# Altium PCB RF-2530-a.PcbDoc
Units mm, origin at the board's own origin, x right, y up, seen from the top; angles counter-clockwise.
Board outline 26.25 x 38.25 mm, 2 copper layers (Top Layer, Bottom Layer); 37 components, 37 nets, 138 pads, 97 vias.
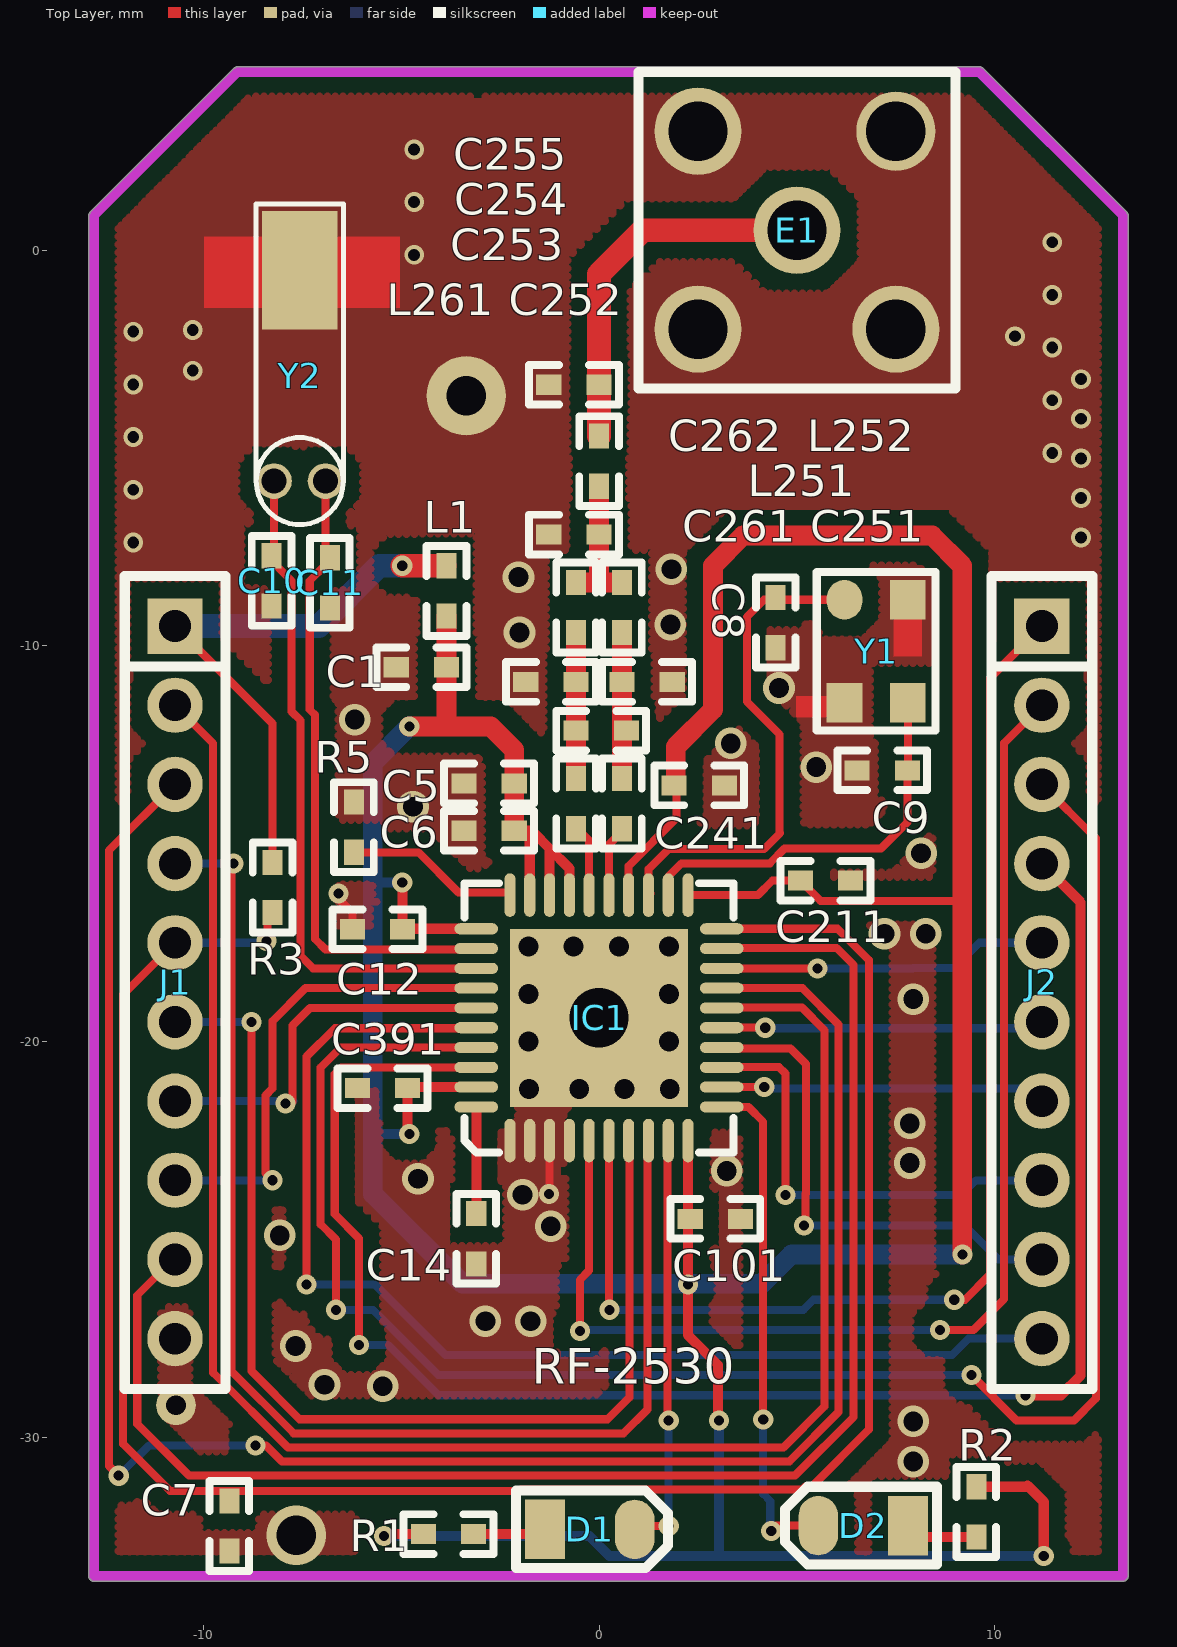
[diagram p0: Top Layer view]
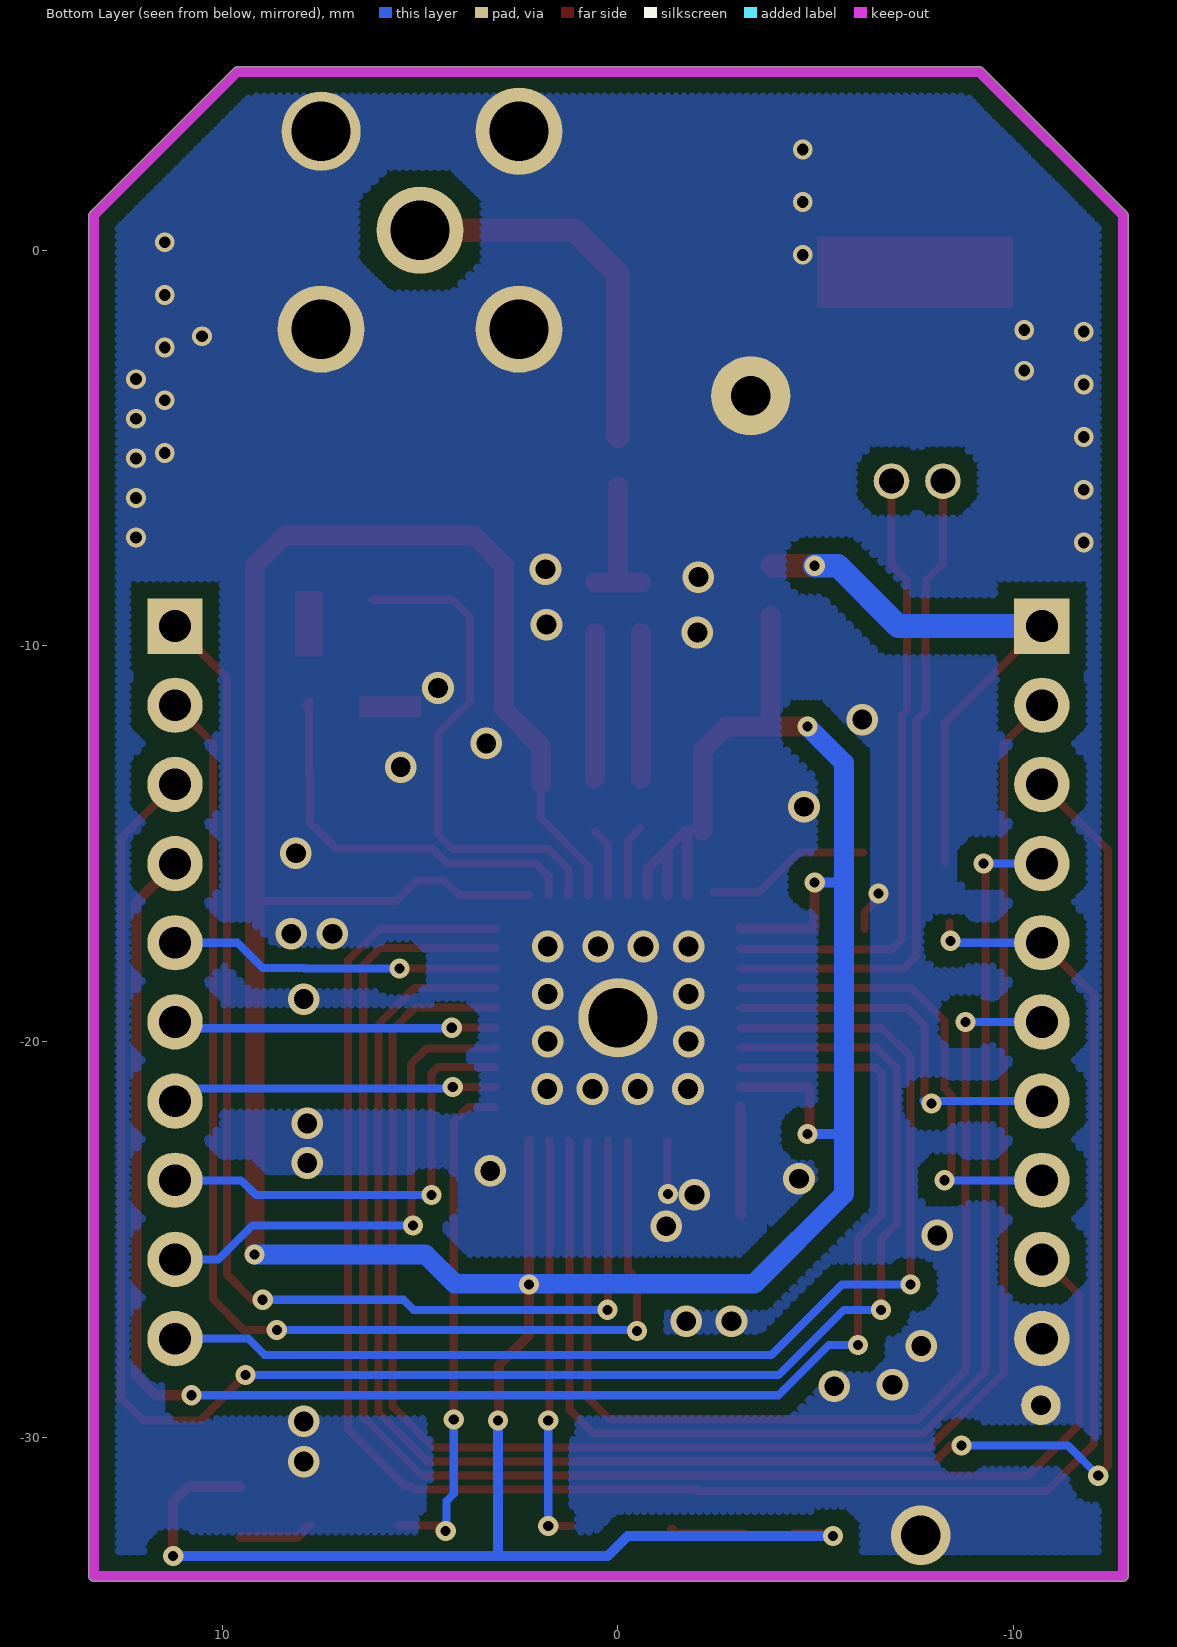
[diagram p1: Bottom Layer view, seen from below]

## Layer stack, top to bottom
Top Layer: signal copper 0.0356
Dielectric: dielectric 0.32, FR-4, Dk 4.8
Bottom Layer: signal copper 0.0356

## Board outline
-12.888,-33.5 -12.888,0.869 cw(c-12.761,0.869) -12.85,0.959 -12.851,0.959 -9.219,4.59 -9.22,4.59 cw(c-9.129,4.5) -9.129,4.627 9.608,4.627 cw(c9.608,4.5) 9.698,4.59 13.329,0.959 cw(c13.239,0.869) 13.367,0.869 13.367,-33.5 cw(c13.239,-33.5) 13.239,-33.627 -12.761,-33.627 cw(c-12.761,-33.5)

## Design rules (kind name [scope] priority, off if disabled: settings)
Clearance Clearance_1 [All] p1 off: gap=0.4
Clearance [All] p2: gap=0.152
MinimumSolderMaskSliver [All] p1: minsoldermaskwidth=0.01
PolygonConnect [All] p1: connectstyle=Direct reliefconductorwidth=0.254 reliefentries=4 polygonreliefangle="90 Angle"
RoutingVias [All] p1: holewidth=0.254 width=0.508 viastyle="Through Hole" minholewidth=0.203 minwidth=0.508 maxholewidth=0.711 maxwidth=1.27
SilkToSilkClearance [All] p1: silktosilkclearance=0
SilkscreenOverComponentPads [All] p1: minsilkscreentomaskgap=0
SolderMaskExpansion [All] p1: expansion=0.102
TestPointUsage [All] p1: valid=0 allowmultiple=FALSE
Testpoint [All] p1: side=15 testpointundercomponent=TRUE minsize=1.016 maxsize=2.54 preferedsize=1.524 minholesize=0 maxholesize=1.016 preferedholesize=0.813 testpointgrid=0.025 style=1021 order=0-112345678
Width [All] p1: maxlimit=2.032 minlimit=0.2 preferedwidth=0.203
21 further rules are at their usual default settings.

## Components (designator, comment, footprint, x,y, rotation, side; value= is the part's Value field where it differs from the comment)
C1 "2.2u" 0402 -3.853,-10.541 r180 top
C5 "0.1" 0402 -2.142,-13.476 r180 top
C6 "220p" 0402 -2.142,-14.67 r180 top
C7 "0.1" 0402 -9.339,-31.598 r270 top
C8 "27pF" 0402 4.462,-8.777 r270 top
C9 "27pF" 0402 7.79,-13.146 r180 top
C10 "15pF" 0402 -8.272,-7.722 r270 top
C11 "15pF" 0402 -6.799,-7.773 r270 top
C12 "0.1" 0402 -4.961,-17.159 r180 top
C14 "1uF" 0402 -3.1,-24.343 r270 top
C101 "0.1" 0402 2.303,-24.475 r0 top
C211 "0.1" 0402 5.086,-15.932 r0 top
C241 "0.1" 0402 1.897,-13.527 r0 top
C251 "18p" 0402 0.58,-14.619 r90 top
C252 "1p" 0402 0.58,-9.666 r90 top
C253 "" 0402 0,-7.188 r180 top
C254 "2.2p" 0402 0,-5.969 r90 top
C255 "" 0402 -1.27,-3.404 r0 top
C261 "18p" 0402 -0.58,-14.619 r90 top
C262 "1p" 0402 -0.58,-10.911 r180 top
C391 "1u" 0402 -4.834,-21.173 r180 top
D1 "LED" LED-0603 -2.1,-33.249 r0 top
D2 "LED" LED-0603 8.542,-31.293 r180 top
E1 "50oh" ANT 5,0.5 r0 top
IC1 "CC2530" PVQFN-N40 -2.25,-22.496 r90 top locked
J1 "CON10" SIP10-2.0 -10.711,-9.5 r270 top locked
J2 "CON10" SIP10-2.0 11.189,-9.5 r270 top locked
L1 "?H" 0402 -3.853,-9.246 r90 top
L251 "" 0402 -0.58,-12.141 r0 top
L252 "2nH" 0402 0.58,-10.911 r0 top
L261 "2nH" 0402 -0.58,-9.666 r90 top
R1 "330R" 0402 -3.167,-32.436 r180 top
R2 "330R" 0402 9.533,-32.512 r90 top
R3 "10K" 0402 -8.247,-16.739 r90 top
R5 "56K" 0402 -6.19,-15.215 r90 top
Y1 "32M" XT-SMD3225 5.501,-8.136 r270 top
Y2 "32.768K" XT_3 -8.209,-5.838 r0 top

## Footprints (in the part's own frame and the unit in brackets; to place one, negate y for a bottom-side part, rotate by r counter-clockwise, add the part's x,y. Pads: shape width x height; smd on the part's side, far side on the other; paste and mask are expansions set on the pad)
0402 [mil]
  rect 25x20 smd: 1(0,0) 2(50,0)
  silkscreen extent -20,-20 70,20
ANT [mm]
  round 2.2 hole 1.5: 1(0,0) 2(-2.5,-2.5) 2(-2.5,2.5) 2(2.5,-2.5)
  round 2 hole 1.5: 2(2.5,2.5)
  silkscreen extent -4,-4 4,4
LED-0603 [mm]
  rect 1x1.5 smd: A(0.737,0.93)
  oval 1x1.5 smd: K(3,0.93)
  silkscreen extent 0,-0.05 3.84,1.91
PVQFN-N40 [mm]
  oval 1.1x0.28 smd: 1(0,0) 2(0,-0.5) 3(0,-1) 4(0,-1.5) 5(0,-2) 6(0,-2.5) 7(0,-3) 8(0,-3.5) 9(0,-4) 10(0,-4.5) 21(6.2,-4.5) 22(6.2,-4) 23(6.2,-3.5) 24(6.2,-3) 25(6.2,-2.5) 26(6.2,-2) 27(6.2,-1.5) 28(6.2,-1) 29(6.2,-0.5) 30(6.2,0)
  oval 0.28x1.1 smd: 11(0.85,-5.35) 12(1.35,-5.35) 13(1.85,-5.35) 14(2.35,-5.35) 15(2.85,-5.35) 16(3.35,-5.35) 17(3.85,-5.35) 18(4.35,-5.35) 19(4.85,-5.35) 20(5.35,-5.35) 31(5.35,0.85) 32(4.85,0.85) 33(4.35,0.85) 34(3.85,0.85) 35(3.35,0.85) 36(2.85,0.85) 37(2.35,0.85) 38(1.85,0.85) 39(1.35,0.85) 40(0.85,0.85)
  rect 4.5x4.5 smd: 41(3.1,-2.25)
  silkscreen extent -0.3,-5.65 6.5,1.15
SIP10-2.0 [mm]
  rect 1.4x1.4 hole 0.8: 1(0,0)
  round 1.4 hole 0.8: 2(2,0) 3(4,0) 4(6,0) 5(8,0) 6(10,0) 7(12,0) 8(14,0) 9(16,0) 10(18,0)
  silkscreen extent -1.27,-1.27 19.27,1.27
XT-SMD3225 [mm]
  oval 1x0.9 smd: 1(0.7,0.7)
  rect 1x0.9 smd: 2(3.3,2.3) 3(3.3,0.7) 4(0.7,2.3)
  silkscreen extent 0,0 4,3
XT_3 [mm]
  round 0.9 hole 0.635: 1(1.3,0) 2(0,0)
  rect 1.9x3 smd: ""(0.65,5.325)
  silkscreen extent -0.45,-1.1 1.75,7

## Part data
C1 C5 C6 C7 C8 C9 C10 C11 C12 C14 C101 C211 C241 C251 C252 C253 C254 C255 C261 C262 C391: library part CAP, "Capacitor"
E1: library part ANTENNA, "Generic Antenna"
IC1: library part CC2430
J1 J2: "Connector"
L1 L251 L252 L261: library part INDUCTOR
R1 R2 R3 R5: library part RES2
Y1: library part CRY
Y2: library part CRYSTAL, "Crystal"

## Free pads (board coordinates)
  round 2 hole 1.5: 0(0,-19.396)
  round 2 hole 1: 1(-3.353,-3.683)
  round 1 hole 0.5: 4(-10.685,-29.185)

## Via types
v1: diameter 0.8, hole 0.5, Top Layer to Bottom Layer, 39 vias
v2: diameter 0.508, hole 0.254, Top Layer to Bottom Layer, 36 vias
v3: diameter 0.5, hole 0.3, Top Layer to Bottom Layer, 21 vias
v4: diameter 1.5, hole 1, Top Layer to Bottom Layer, 1 vias

## Nets (pads, with @x,y where several pads share a name; then routed paths per layer and width w, separated by ;. In a path a pad name is that pad's centre, name@x,y a point inside that pad or via, vN(x,y) a via of type N, cw(c..) or ccw(c..) an arc to the next point about the centre after c; other vN are vias at no path point)
1VCC1.8: C14.1 IC1.40 | length 2.7
  Top Layer w0.254: C14.1@-3.116,-24.359 C14.1 IC1.40
CSN: IC1.6 J2.1 | length 31.3
  Top Layer w0.203: IC1.6 0.25,-26.76 v2(0.262,-26.772) ; v2(8.974,-26.518) 9.245,-26.518 9.88,-25.883 9.88,-10.81 J2.1
  Bottom Layer w0.203: v2(0.262,-26.772) 5.164,-26.772 5.418,-26.518 7.323,-26.518 v2(8.974,-26.518) ; J2.1@11.189,-9.592 J2.1
DC: IC1.34 J1.8 | length 12.1
  Top Layer w0.203: v2(-8.247,-23.5) -8.425,-23.322 -8.425,-21.355 -8.247,-21.177 -8.247,-19.482 -7.411,-18.646 IC1.34
  Bottom Layer w0.203: J1.8 v2(-8.247,-23.5)
DD: IC1.35 J1.7 | length 10.2
  Top Layer w0.203: v2(-7.917,-21.565) -7.79,-21.565 -7.742,-21.518 -7.742,-19.587 -7.302,-19.146 IC1.35
  Bottom Layer w0.203: J1.7 -7.714,-21.5 -7.779,-21.565 v2(-7.917,-21.565)
GND: C1.2 C5.2 C6.2 C7.2 C8.2 C9.2 C10.2 C11.2 C12.2 C14.2 C101.2 C211.2 C241.2 C253.2 C255.1 C262.2 C391.2 E1.2 IC1.1 IC1.2 IC1.3 IC1.4 IC1.41 J1.10 L252.2 pad.0 pad.1 pad.4 R5.2 Y1.3 Y1.4 Y2. | length 2.5
  Top Layer w0.2: v2@-6.706,-16.256 -6.231,-16.731 C12.2 ; v2(-1.262,-23.851) -1.25,-23.839 IC1.3
  other v1: 7.936,-30.607 7.936,-29.591 -5.464,-28.702 -6.934,-28.663 -7.664,-27.686 -2.87,-27.063 -1.727,-27.063 -8.064,-24.892 -1.219,-24.663 -1.93,-23.863 -4.572,-23.463 3.226,-23.263 7.849,-23.063 7.849,-22.063 -1.771,-21.196 -0.501,-21.196 0.642,-21.196 1.785,-21.196 -1.785,-19.996 1.771,-19.996 7.936,-18.923 -1.785,-18.796 1.771,-18.796 -1.785,-17.596 -0.642,-17.596 0.501,-17.596 1.771,-17.596 7.214,-17.272 8.255,-17.272 8.136,-15.24 -4.699,-14.063 5.486,-13.063 3.327,-12.463 -6.172,-11.863 4.547,-11.063 -2.007,-9.663 1.803,-9.463 -2.032,-8.263 1.829,-8.063
  other v2: -6.579,-16.256
  other v3: -11.766,-7.386 12.177,-7.263 12.177,-6.263 -11.766,-6.056 12.177,-5.263 11.45,-5.126 -11.766,-4.725 12.177,-4.263 11.45,-3.796 -11.766,-3.394 12.177,-3.263 -10.264,-3.048 11.45,-2.465 10.51,-2.179 -11.766,-2.063 -10.264,-2.024 11.45,-1.134 -4.669,-0.122 11.45,0.197 -4.669,1.209 -4.669,2.54
  other v4: -7.645,-32.463
LED1: D2.K IC1.11 | length 12.9
  Top Layer w0.203: IC1.11 3.772,-21.646 4.148,-22.022 v2(4.148,-29.541) ; v2(4.351,-32.36) 4.488,-32.223 D2.K
  Bottom Layer w0.203: v2(4.148,-29.541) 4.148,-31.42 4.326,-31.598 4.326,-32.335 v2(4.351,-32.36)
LED2: D1.K IC1.9 | length 10.3
  Top Layer w0.203: D1.K@1.176,-32.233 v2(1.761,-32.233) ; IC1.9 1.732,-22.514 1.732,-27.026 1.732,-29.537 v2(1.761,-29.566)
  Bottom Layer w0.203: v2(1.761,-32.233) v2(1.761,-29.566)
MISO: IC1.37 J2.3 | length 47.5
  Top Layer w0.203: v2(-6.647,-26.772) -6.647,-24.997 -7.031,-24.613 -7.031,-20.654 -6.524,-20.146 IC1.37 ; v2(9.406,-28.423) 10.549,-29.566 11.997,-29.566 12.55,-29.013 12.55,-17.12 ; J2.3 12.55,-14.86 12.55,-17.12 ; 12.55,-16.667 12.55,-17.12
  Bottom Layer w0.203: v2(-6.647,-26.772) -5.712,-26.772 -4.061,-28.423 7.831,-28.423 v2(9.406,-28.423)
MOSI: IC1.38 J2.4 | length 43
  Top Layer w0.203: v2(-6.063,-27.661) -6.063,-24.969 -6.676,-24.356 -6.676,-20.813 -6.509,-20.646 IC1.38
  Top Layer w0.254: v2(10.778,-28.931) 11.667,-28.931 12.169,-28.429 12.169,-16.479 J2.4
  Bottom Layer w0.203: v2(-6.063,-27.661) -5.326,-27.661 -4.056,-28.931 v2(10.778,-28.931)
NetC1_1: C1.1 C5.1 C6.1 C12.1 C101.1 C211.1 C241.1 C391.1 IC1.10 IC1.21 IC1.24 IC1.27 IC1.28 IC1.29 IC1.31 IC1.39 L1.1 R1.2 R2.2 | length 121.7
  Top Layer w0.203: IC1.24 0.75,-15.557 1.956,-14.351 1.956,-13.586 C241.1 ; IC1.21 4.013,-16.296 4.378,-15.932 C211.1 5.594,-16.44 7.188,-16.44 8.98,-16.44 9.177,-16.637
  Top Layer w0.254: v2@-5.377,-32.436 R1.2 ; v2@-4.961,-15.986 C12.1 -4.948,-17.146 IC1.31 ; v2@-4.834,-22.286 C391.1 -4.808,-21.146 IC1.39 ; C6.1@-2.105,-14.707 C6.1 -1.701,-14.67 -1.664,-14.707 ; -1.77,-14.707 -1.664,-14.707 ; IC1.29 -1.75,-14.727 ; IC1.28 -1.25,-15.121 ; IC1.27 -0.75,-15.621 -1.25,-15.121 ; v2(2.243,-26.137) 2.243,-27.407 3.005,-28.169 v2@3.005,-29.541 ; v2@2.25,-26.13 IC1.10 ; R2.2 10.803,-31.242 10.828,-31.217 11.235,-31.623 v2(11.235,-32.995) ; -1.664,-14.707 -1.25,-15.121
  Top Layer w0.5: v2(-4.793,-12.04) -3.802,-12.04 ; L1.1 C1.1 -3.853,-11.989 -3.802,-12.04 ; C6.1 C5.1 -2.142,-12.634 -2.735,-12.04 -3.802,-12.04 ; C241.1@1.938,-13.486 1.938,-12.548 2.878,-11.608 2.878,-7.976 3.64,-7.214 8.415,-7.214 9.177,-7.976 9.177,-16.637 v2(9.177,-25.375)
  Bottom Layer w0.254: -5.713,-22.327 v2(-4.793,-22.327) ; -5.713,-15.977 v2(-4.97,-15.977) ; v2(-5.428,-32.487) -0.246,-32.487 0.262,-32.995 3.031,-32.995 ; v2(3.031,-29.566) 3.031,-32.995 ; v2(11.235,-32.995) 3.031,-32.995
  Bottom Layer w0.5: v2(-4.793,-12.04) -5.713,-12.961 -5.713,-15.977 -5.713,-22.327 -5.713,-23.845 -3.442,-26.116 4.119,-26.116 4.859,-25.375 v2(9.177,-25.375)
NetC8_1: C8.1 IC1.23 Y1.1 | length 12.9
  Top Layer w0.203: IC1.23@1.295,-16.251 IC1.23 1.25,-15.641 1.754,-15.137 4.167,-15.137 4.572,-14.732 4.564,-14.724 4.564,-12.236 3.734,-11.406 3.734,-9.271 4.169,-8.836 Y1.1
NetC9_1: C9.1 IC1.22 Y1.2 | length 10.2
  Top Layer w0.203: IC1.22 1.75,-15.829 2.087,-15.492 3.962,-15.492 4.314,-15.492 4.686,-15.121 7.125,-15.121 7.79,-14.456 C9.1 ; C9.1@7.801,-13.146 Y1.2
  Top Layer w0.254: Y1.2 Y1.2@7.866,-11.501
NetC10_1: C10.1 IC1.33 Y2.2 | length 16.8
  Top Layer w0.203: Y2.2 -8.209,-7.912 -7.764,-8.357 -7.764,-11.659 -7.536,-11.888 -7.536,-17.831 -7.221,-18.146 IC1.33
NetC11_1: C11.1 IC1.32 Y2.1 | length 16
  Top Layer w0.203: Y2.1 -6.909,-7.959 -7.307,-8.357 -7.307,-11.613 -7.18,-11.74 -7.18,-17.399 -6.912,-17.667 -3.121,-17.667 IC1.32
NetC251_1: C251.1 IC1.25 | length 1.7
  Top Layer w0.203: IC1.25 0.25,-15.015 C251.1@0.58,-14.685
NetC251_2: C251.2 C252.1 L251.2 L252.1 | length 3.7
  Top Layer w0.5: C251.2 C252.1
NetC252_2: C252.2 C253.1 C254.1 L261.2 | length 3.6
  Top Layer w0.5: L261.2 C252.2 ; 0,-8.388 C254.1
NetC254_2: C254.2 C255.2 E1.1 | length 9.5
  Top Layer w0.6: C254.2 C255.2 0,-0.61 1.11,0.5 E1.1
NetC261_1: C261.1 IC1.26 | length 1.8
  Top Layer w0.203: C261.1@-0.559,-14.605 -0.25,-14.914 IC1.26
NetC261_2: C261.2 C262.1 L251.1 L261.1 | length 3.7
  Top Layer w0.5: C261.2 L261.1
NetD1_A: D1.A R1.1 | length 1.9
  Top Layer w0.254: R1.1 -1.481,-32.436 D1.A
NetD2_A: D2.A R2.1 | length 1.8
  Top Layer w0.254: D2.A 8.095,-32.512 R2.1
NetIC1_30: IC1.30 R5.1 | length 4.2
  Top Layer w0.203: R5.1 -4.564,-15.215 -3.548,-16.231 -2.43,-16.231
P00: IC1.19 J1.9 | length 38.8
  Top Layer w0.203: J1.9 -10.76,-25.5 -11.665,-26.405 -11.665,-29.653 -10.359,-30.959 4.954,-30.959 6.434,-29.48 6.434,-18.06 6.002,-17.628 3.118,-17.628 IC1.19
P01: IC1.18 J2.5 | length 8.4
  Top Layer w0.203: IC1.18 v2(5.52,-18.146)
  Bottom Layer w0.203: v2(5.52,-18.146) 7.922,-18.146 7.933,-18.136 8.974,-18.136 9.61,-17.5 J2.5
P1.2: IC1.8 J1.4 | length 32.6
  Top Layer w0.203: v2(-9.238,-15.494) -9.263,-15.469 -9.288,-15.469 -9.288,-28.316 -7.712,-29.893 0.362,-29.893 0.621,-29.893 1.227,-29.287 1.227,-28.423 1.227,-22.519 IC1.8
  Bottom Layer w0.203: J1.4 -9.243,-15.5 v2(-9.238,-15.494)
P1.3: IC1.7 J1.6 | length 27.5
  Top Layer w0.203: v2(-8.78,-19.5) -8.78,-28.321 -7.565,-29.537 0.215,-29.537 0.77,-28.982 0.77,-22.516 IC1.7
  Bottom Layer w0.203: J1.6 v2(-8.78,-19.5)
P02: IC1.17 J1.3 | length 50.6
  Top Layer w0.203: v2(-12.133,-30.963) -12.376,-30.72 -12.376,-15.165 J1.3 ; v2(-8.679,-30.201) -8.409,-30.201 -8.007,-30.604 4.807,-30.604 6.053,-29.358 6.053,-19.564 5.136,-18.646 IC1.17
  Bottom Layer w0.203: v2(-12.133,-30.963) -11.371,-30.201 v2(-8.679,-30.201)
P03: IC1.16 J1.2 | length 46.3
  Top Layer w0.203: J1.2 -9.746,-12.465 -9.746,-28.362 -7.859,-30.248 4.66,-30.248 5.698,-29.21 5.698,-28.624 5.698,-19.711 5.125,-19.138 3.108,-19.138 IC1.16 IC1.16@3.106,-19.152
P04: IC1.15 J2.6 | length 8.2
  Top Layer w0.203: IC1.15 v2(4.199,-19.646)
  Bottom Layer w0.203: v2(4.199,-19.646) 4.213,-19.66 5.723,-19.66 11.029,-19.66 J2.6
P05: IC1.14 J2.9 | length 12.8
  Top Layer w0.203: IC1.14 3.122,-20.168 4.834,-20.168 5.232,-20.566 5.232,-23.832 5.215,-23.85 5.215,-24.605 v2(5.182,-24.638)
  Bottom Layer w0.203: v2(5.182,-24.638) 9.235,-24.638 10.097,-25.5 J2.9
P06: IC1.13 J2.8 | length 11.4
  Top Layer w0.203: IC1.13 3.108,-20.638 4.542,-20.638 4.707,-20.803 v2(4.707,-23.876)
  Bottom Layer w0.203: v2@4.724,-23.876 9.144,-23.876 9.52,-23.5 J2.8
P07: IC1.12 J2.7 | length 8.3
  Top Layer w0.203: IC1.12 v2(4.174,-21.146)
  Bottom Layer w0.203: v2(4.174,-21.146) 4.174,-21.184 10.873,-21.184 J2.7
P20: IC1.36 J2.10 | length 29.8
  Top Layer w0.203: v2(-7.387,-26.137) -7.387,-20.375 -6.672,-19.66 -3.114,-19.66 IC1.36
  Bottom Layer w0.203: v2(-7.387,-26.137) -5.656,-26.137 -3.878,-27.915 8.923,-27.915 9.338,-27.5 J2.10
RESET_N: C7.1 IC1.20 J1.5 R3.1 | length 51.9
  Top Layer w0.203: J1.5 -12.02,-18.81 -12.02,-30.161 -10.838,-31.344 -1.998,-31.344 -1.969,-31.315 5.134,-31.315 5.23,-31.219 5.391,-31.219 6.815,-29.795 6.815,-17.938 6.024,-17.146 IC1.20 ; v2(-8.399,-17.45) -8.374,-17.425 R3.1@-8.374,-16.993
  Bottom Layer w0.203: J1.5 -8.449,-17.5 v2(-8.399,-17.45)
SCK: IC1.5 J2.2 | length 31.5
  Top Layer w0.203: v2(-0.483,-27.305) -0.483,-26.014 -0.25,-25.781 IC1.5 ; v2(8.619,-27.28) 9.457,-27.28 10.235,-26.502 10.235,-12.454 J2.2
  Bottom Layer w0.203: v2(-0.483,-27.305) -0.458,-27.28 v2(8.619,-27.28) ; J2.2@11.189,-11.659 J2.2
VDD_3.3V: J1.1 L1.2 R3.2 | length 14.4
  Top Layer w0.203: J1.1 -8.247,-11.964 R3.2
  Top Layer w0.6: v2(-4.97,-7.976) L1.2@-3.906,-7.976
  Bottom Layer w0.6: J1.1 -7.079,-9.5 -5.555,-7.976 v2(-4.97,-7.976)

## Polygon pours and split planes (outlines as drawn)
GND on Top Layer "GND" (hatched 90Degree grid 0 track 0.2, remove dead copper, pour order 1000): -12.598,-33.401 13.081,-33.401 13.081,0.61 9.5,4.191 -9.144,4.191 -12.573,0.762
GND on Bottom Layer "GND" (hatched 90Degree grid 0 track 0.2, remove dead copper, pour order 1001): -12.598,-33.401 13.081,-33.401 13.081,0.61 9.5,4.191 -9.144,4.191 -12.573,0.762

## Keep-outs
Keep-Out Layer:
  lines w0.254: -12.761,-33.5 -12.761,0.869 -9.129,4.5 9.608,4.5 13.239,0.869 13.239,-33.5 -12.761,-33.5

## Other copper
Top Layer:
  rectangle net GND: -9.982,-1.463 -5.029,0.337
  rectangle net GND: 4.978,-11.811 6.528,-11.263
  rectangle net GND: 7.442,-10.263 8.158,-8.612

## Silkscreen, mask and mechanical layers (free items; w line width, h text height)
Top Overlay:
  text "RF-2530" at -1.702,-28.935 h1.52
Mechanical 1:
  lines w0.254: -12.761,-33.5 13.239,-33.5 13.239,0.869 9.608,4.5 -9.129,4.5 -12.761,0.869 -12.761,-33.5